# EAGLE board Voltage_Amp (EAGLE 9.6.1)
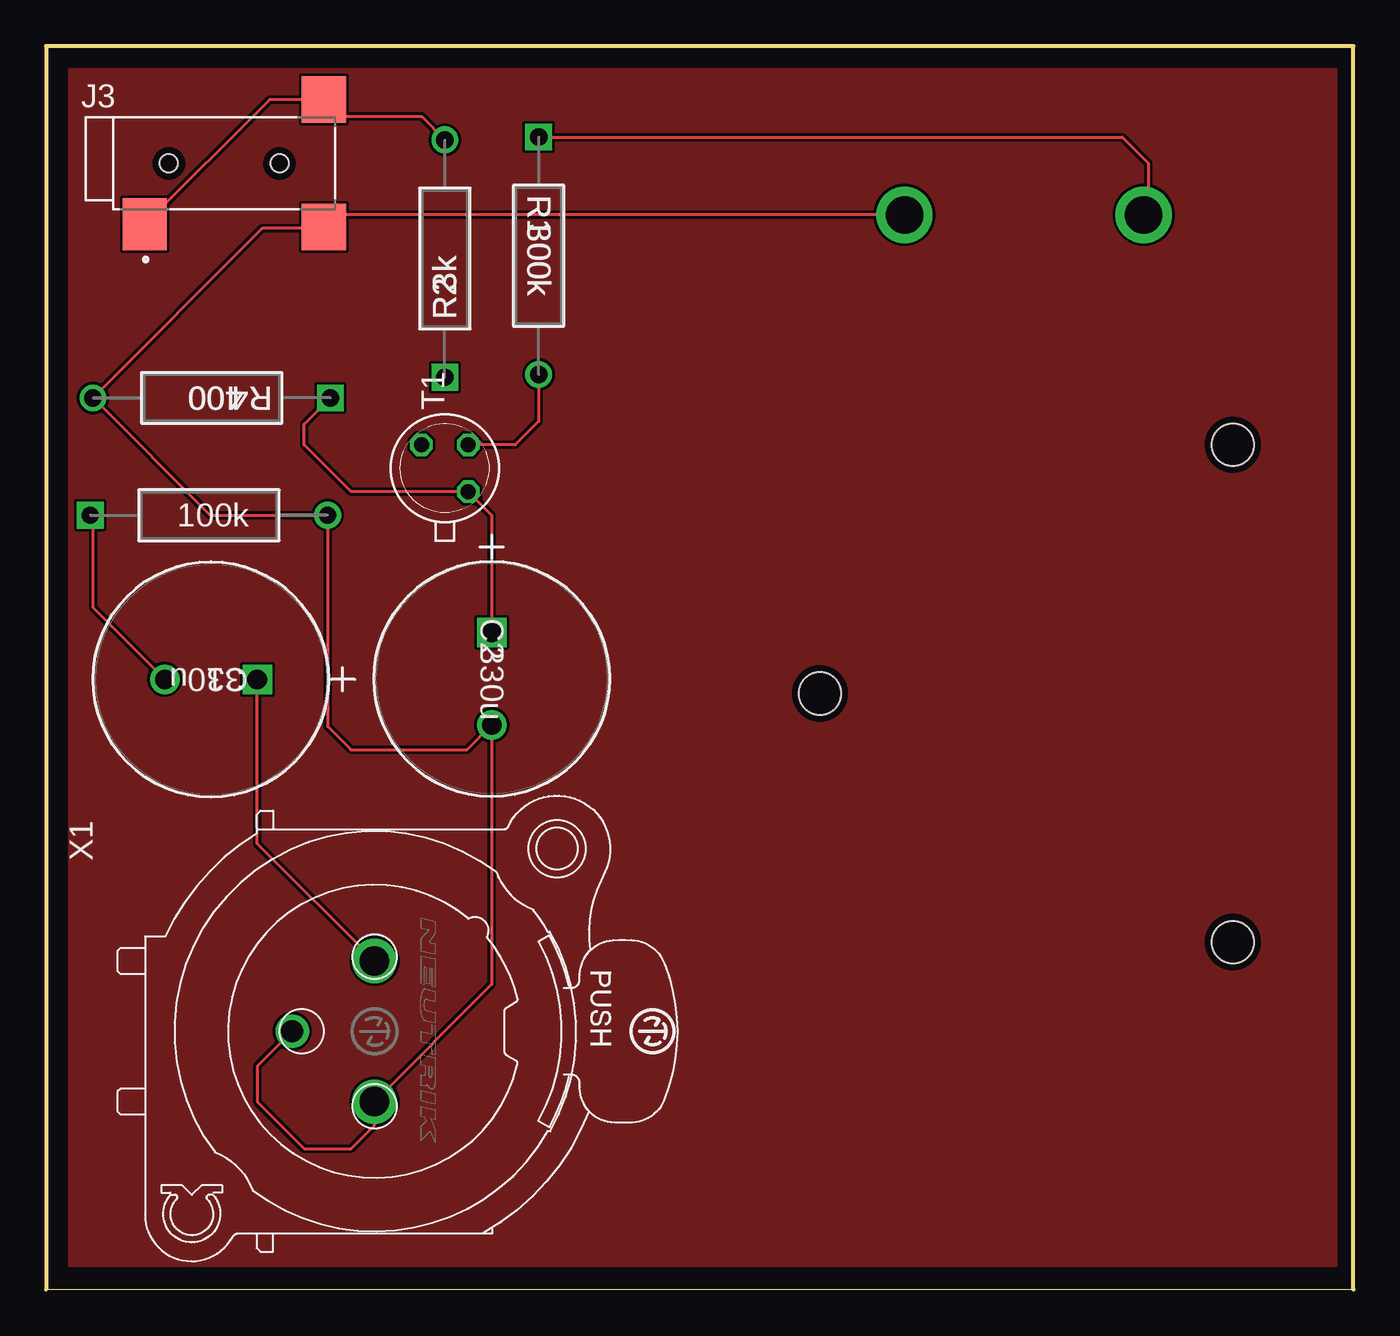
[diagram p0: board, top side]
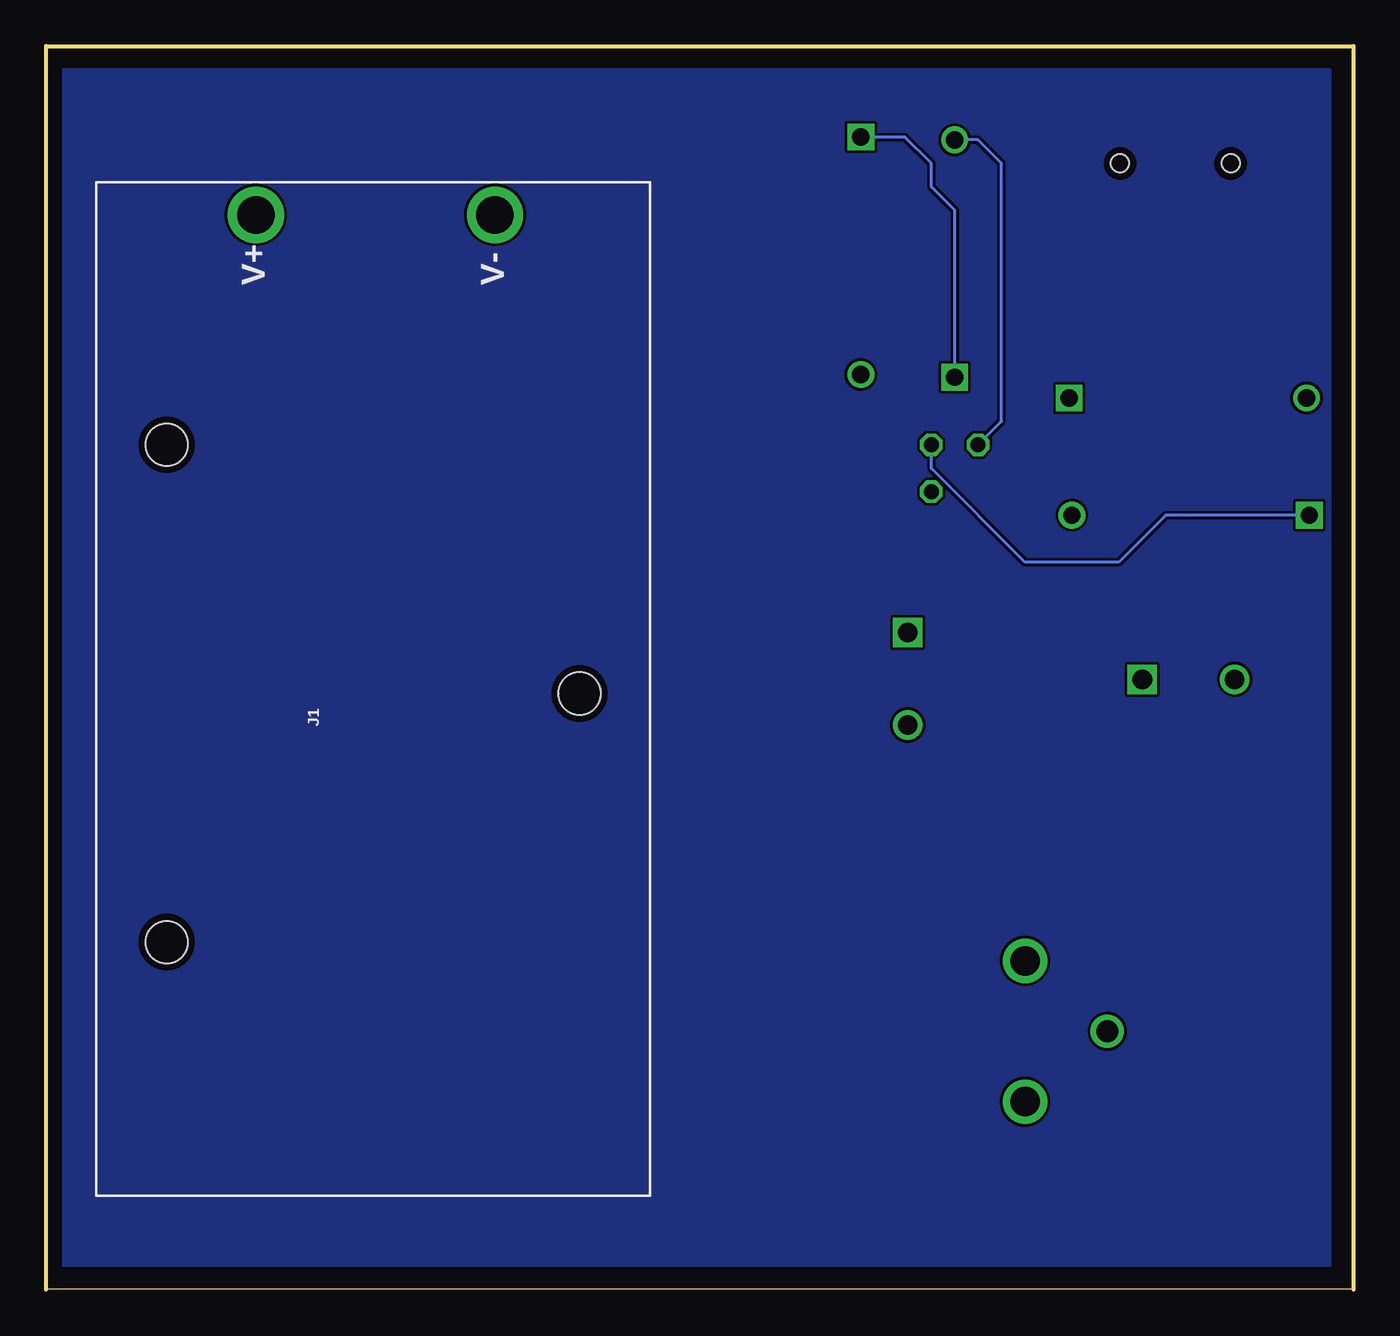
[diagram p1: board, bottom side, seen from below]

Size 70.79 x 67.3 mm. Coordinates in mm from the lower left corner, seen from the top.
Outline: 0,0 70.79,0 70.79,67.3 0,67.3 0,0
Copper layers (1*16): Top 0.035559375mm / dielectric 1.6mm / Bottom 0.035559375mm
Design rules "oshpark-2layer": minimum track width 6mil, minimum drill 10mil, track to track 6mil, track to pad 6mil, pad to pad 6mil, via to via 6mil, smd to smd 6mil, copper to edge 15mil, drill to drill 6mil, minimum pad ring 5mil, minimum via ring 5mil, stop-mask expansion 2.5mil, vias tented up to drill 0mil, thermal gap 10mil

## Footprints (pad centres in the part's own frame; a part is rotated, then mirrored left to right if it is on the bottom)
U1-Z_NCH = drill 1.067 pad 1.575 square: 1 0,0 | drill 1.067 pad 1.575: 2 5.004,0
BC9VPC = drill 2.032: V+ 53.086,21.336; V- 53.086,8.382 | hole 2.286: 27.178,3.81; 13.716,26.162; 40.64,26.162
MJ-2523-SMT-TR = smd 2.4 x 2.8: 1 -3.55,-3.3 | smd 2.4 x 2.5: 2 6.15,-3.45; 4 6.15,3.45 | hole 1: -2.25,0; 3.75,0
CMF55 = drill 0.94 pad 1.448 square: 1 -12.852,0 | drill 0.94 pad 1.448: 2 0,0
TO18 = drill 0.813 octagon: 1 -1.27,-1.27; 2 1.27,-1.27; 3 1.27,1.27
NC3FAV1 = drill 1.6: 1+G 3.81,0; 2 -3.81,0 | drill 1.2: 3 0,-4.45

## Placement (x,y rotation side)
C1  330u  [U1-Z_NCH]  11.43,33.02 180 top
C2  330u  [U1-Z_NCH]  24.13,35.56 270 top
J1  9V  [BC9VPC]  38.1,5.08 90 bottom
J3  MJ-2523-SMT-TR  [MJ-2523-SMT-TR]  8.89,60.96 0 top
R1  300k  [CMF55]  26.67,49.53 270 top
R2  3k  [CMF55]  21.59,62.23 90 top
R3  100k  [CMF55]  15.24,41.91 0 top
R4  400  [CMF55]  2.54,48.26 180 top
T1  2N2222  [TO18]  21.59,44.45 90 top
X1  MC3FAV1  [NC3FAV1]  17.78,13.97 270 top

## Library data of the parts
C1 C2 = Aud_AMP; BUILT_BY: EMA_UL_Team; MANUFACTURER_PART_NUMBER: UKZ1E331MHM; SOURCELIBRARY: Nichicon_2014-12-31; VENDOR: Nichicon
J1 = SparkFun-Connectors; PROD_ID: BATT-10855
J3 = Audio Connectors; CREATED_BY: PCBLayout.com; DIGIKEY_PN: CP-2523MJTR-ND; MANUFACTURER: CUI Devices; MPN: MJ-2523-SMT-TR
R1 = Aud_AMP; BUILT_BY: EMA_UL_Team; MANUFACTURER_PART_NUMBER: RN55E3003BB14; VENDOR: Vishay
R2 = Aud_AMP; BUILT_BY: EMA_UL_Team; MANUFACTURER_PART_NUMBER: RN55C3001BB14; VENDOR: Vishay
R3 = Aud_AMP; BUILT_BY: EMA_UL_Team; MANUFACTURER_PART_NUMBER: RN55E1003BB14; VENDOR: Vishay
R4 = Aud_AMP; BUILT_BY: EMA_UL_Team; MANUFACTURER_PART_NUMBER: RN55E4000BRE6; VENDOR: Vishay
T1 = transistor
X1 = con-neutrik_ag; OC_FARNELL: unknown; OC_NEWARK: unknown

## Nets
0: C2.2 J1.V- J3.2 R3.2 R4.2 X1.1+G X1.3
N$1: C1.2 R1.2 R3.1 T1.2
N$2: J1.V+ R1.1 R2.1
N$3: J3.1 J3.4 R2.2 T1.3
N$4: C2.1 R4.1 T1.1
N$5: C1.1 X1.2

## Tracks (layer width: path | path; a pad name or v marks a point on that pad's centre or on a via)
0
  Top 0.152: J1.V- 15.7,58.17 J3.2 14.96,57.43 11.71,57.43 R4.2 8.89,41.91 R3.2 15.24,30.48 16.51,29.21 22.78,29.21 C2.2 24.13,16.51 X1.1+G 17.78,8.89 16.51,7.62 13.97,7.62 11.43,10.16 11.43,12.07 X1.3
0V
  pour Top: 1.27,66.04 69.85,66.04 69.85,1.27 1.27,1.27
N$1
  Top 0.152: C1.2 2.54,36.91 2.54,41.76 R3.1 | R1.2 26.67,46.99 25.4,45.72 T1.2
  Bottom 0.152: R3.1 10.16,41.91 12.7,39.37 17.78,39.37 22.86,44.45 T1.2
N$2
  Top 0.152: R1.1 58.27,62.38 59.69,60.96 59.69,58.42 J1.V+
  Bottom 0.152: R2.1 21.59,58.42 22.86,59.69 22.86,60.96 24.28,62.38 R1.1
N$3
  Top 0.152: J3.1 12.09,64.41 J3.4 15.95,63.5 20.32,63.5 R2.2
  Bottom 0.152: T1.3 19.05,46.99 19.05,60.96 20.32,62.23 R2.2
N$4
  Top 0.152: C2.1 24.13,41.91 T1.1 16.51,43.18 13.97,45.72 13.97,46.84 R4.1
N$5
  Top 0.152: X1.2 11.43,24.13 C1.1
X_1
  pour Bottom: 1.27,66.04 1.27,1.27 69.85,1.27 69.85,66.04